# EAGLE board ASD2123 (EAGLE 6.3)
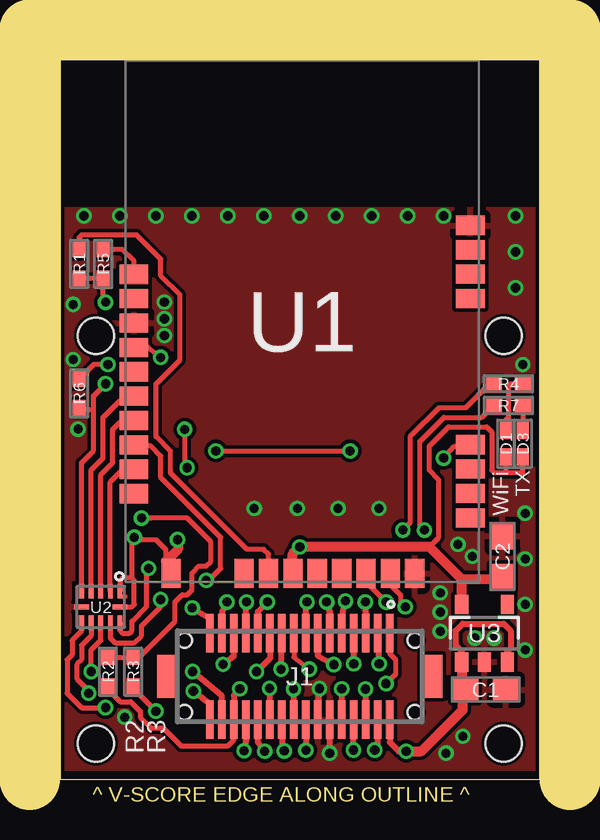
[diagram p0: board, top side]
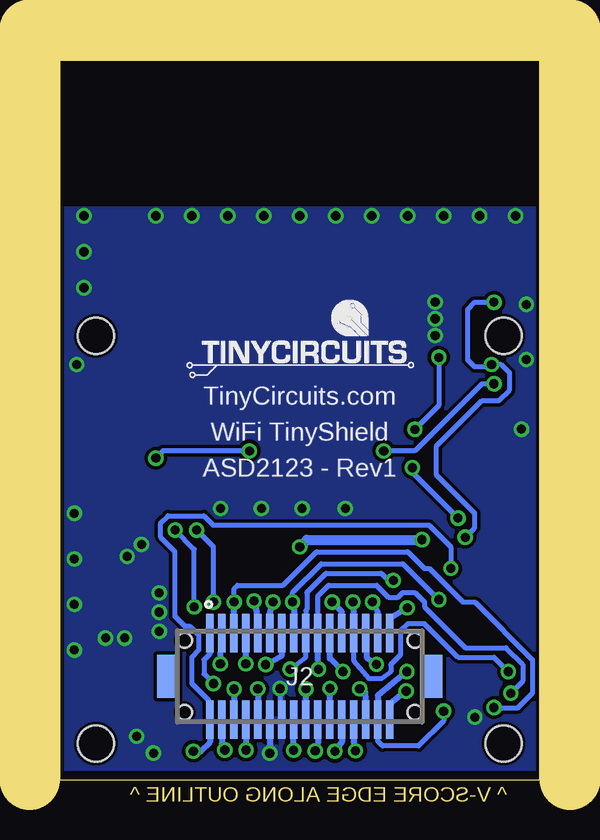
[diagram p1: board, bottom side, seen from below]

Size 20 x 30 mm. Coordinates in mm from the lower left corner, seen from the top.
Outline: 20,0 0,0 0,30 20,30 20,0
Copper layers (1*16): Top 0.035mm / dielectric 1.5mm / Bottom 0.035mm
Design rules "default *": minimum track width 7mil, minimum drill 15mil, track to track 6mil, track to pad 6mil, pad to pad 6mil, via to via 6mil, smd to smd 6mil, copper to edge 6mil, drill to drill 8mil, minimum pad ring 10mil, minimum via ring 5mil, stop-mask expansion 4mil, vias tented up to drill 25mil, thermal gap 10mil
Holes 1.5 mm at 1.5,18.5 18.5,18.5 18.5,1.5 1.5,1.5
tRestrict: 2 lines
bRestrict: 2 lines
Milling: 3 lines

## Footprints (pad centres in the part's own frame; a part is rotated, then mirrored left to right if it is on the bottom)
C0603 = smd 1.1 x 1: 1 -0.85,0; 2 0.85,0
0402_LED = smd 0.7 x 0.5: 1 -0.55,0; 2 0.55,0
DF12-32-DP = smd 0.3 x 1.6: 1 -3.75,-1.8; 2 -3.75,1.8; 3 -3.25,-1.8; 4 -3.25,1.8; 5 -2.75,-1.8; 6 -2.75,1.8; 7 -2.25,-1.8; 8 -2.25,1.8; 9 -1.75,-1.8; 10 -1.75,1.8; 11 -1.25,-1.8; 12 -1.25,1.8; 13 -0.75,-1.8; 14 -0.75,1.8; 15 -0.25,-1.8; 16 -0.25,1.8; 17 0.25,-1.8; 18 0.25,1.8; 19 0.75,-1.8; 20 0.75,1.8; 21 1.25,-1.8; 22 1.25,1.8; 23 1.75,-1.8; 24 1.75,1.8; 25 2.25,-1.8; 26 2.25,1.8; 27 2.75,-1.8; 28 2.75,1.8; 29 3.25,-1.8; 30 3.25,1.8; 31 3.75,-1.8; 32 3.75,1.8 | smd 0.9 x 1.8: F1 -5.5,0; F2 5.5,0 | hole 0.6: -4.8,1.5; 4.8,1.5
DF12-32-DS = smd 0.3 x 1.6: 1 -3.75,1.8; 2 -3.75,-1.8; 3 -3.25,1.8; 4 -3.25,-1.8; 5 -2.75,1.8; 6 -2.75,-1.8; 7 -2.25,1.8; 8 -2.25,-1.8; 9 -1.75,1.8; 10 -1.75,-1.8; 11 -1.25,1.8; 12 -1.25,-1.8; 13 -0.75,1.8; 14 -0.75,-1.8; 15 -0.25,1.8; 16 -0.25,-1.8; 17 0.25,1.8; 18 0.25,-1.8; 19 0.75,1.8; 20 0.75,-1.8; 21 1.25,1.8; 22 1.25,-1.8; 23 1.75,1.8; 24 1.75,-1.8; 25 2.25,1.8; 26 2.25,-1.8; 27 2.75,1.8; 28 2.75,-1.8; 29 3.25,1.8; 30 3.25,-1.8; 31 3.75,1.8; 32 3.75,-1.8 | smd 0.9 x 1.8: F1 -5.5,0; F2 5.5,0 | hole 0.6: -4.8,1.5; 4.8,1.5
0402 = smd 0.65 x 0.55: 1 -0.6,0; 2 0.6,0
ATWINC1500-MR210PB = smd 1.2 x 0.8: 1 7.015,-8.19; 2 7.015,-7.174; 3 7.015,-6.158; 4 7.015,-5.142; 6 7.015,0.954; 7 7.015,1.97; 8 7.015,2.986; 9 7.015,4.002; 10 -7.015,1.964; 11 -7.015,0.948; 12 -7.015,-0.068; 13 -7.015,-1.084; 14 -7.015,-2.1; 15 -7.015,-3.116; 16 -7.015,-4.132; 17 -7.015,-5.148; 18 -7.015,-6.164; 19 -7.015,-7.18 | smd 0.8 x 1.2: 20 -5.465,-10.51; 21 -2.417,-10.51; 22 -1.401,-10.51; 23 -0.385,-10.51; 24 0.631,-10.51; 25 1.647,-10.51; 26 2.663,-10.51; 27 3.679,-10.51; 28 4.695,-10.51
UQFN-12 = smd 0.2 x 0.6: 1 -0.8,-0.65; 2 -0.4,-0.65; 3 0,-0.65; 4 0.4,-0.65; 5 0.8,-0.65; 7 0.8,0.65; 8 0.4,0.65; 9 0,0.65; 10 -0.4,0.65; 11 -0.8,0.65 | smd 0.6 x 0.2: 6 0.8,0; 12 -0.8,0
SOT-25 = smd 0.55 x 0.8: 1 -0.95,-1.2; 2 0,-1.2; 3 0.95,-1.2; 4 0.95,1.2; 5 -0.95,1.2

## Placement (x,y rotation side)
C1  10uF  [C0603]  17.75,3.75 0 top
C2  10uF  [C0603]  18.45,9.3 90 top
D1  GREEN  [0402_LED]  18.6,14 90 top
D3  AMBER  [0402_LED]  19.3,14 90 top
J1  DF12-32-DP  [DF12-32-DP]  10,4.3 180 top
J2  DF12-32-DS  [DF12-32-DS]  10,4.3 0 bottom
R1  100K  [0402]  0.8,21.5 90 top
R2  0.0  [0402]  2,4.5 270 top
R3  NP  [0402]  3.05,4.5 270 top
R4  1.00K  [0402]  18.7,16.5 0 top
R5  100K  [0402]  1.8,21.5 90 top
R6  100K  [0402]  0.8,16.1 270 top
R7  1.00K  [0402]  18.7,15.6 0 top
U1  ATWINC1500-MR210PB  [ATWINC1500-MR210PB]  10.1,19.1 0 top
U2  TXB0104  [UQFN-12]  1.7,7.2 180 top
U3  XC6217A33  [SOT-25]  17.7,6.1 0 top
U$1  [DOCFIELD-TINYCIRCUITS-PCB]  33.91,-10 0 top  (outside the outline)

## Library data of the parts
C1 = tinycircuits; PARTNO: AS-ITM-00002
C2 = tinycircuits; DATABASE: ./../../../../../Components/TinyCircuits_Part_Database.txt; PARTNO: AS-ITM-00002
D1 = tinycircuits; PARTNO: AS-ITM-00038
D3 = tinycircuits; PARTNO: AS-ITM-00058
J1 = tinycircuits; PARTNO: AS-ITM-00015
J2 = tinycircuits; PARTNO: AS-ITM-00012
R1 R5 R6 = tinycircuits; PARTNO: AS-ITM-00004
R2 = tinycircuits; DATABASE: ./../../../../../Components/TinyCircuits_Part_Database.txt; PARTNO: AS-ITM-00076
R3 = tinycircuits; DATABASE: ./../../../../../Components/TinyCircuits_Part_Database.txt; PARTNO: AS-ITM-00076; VALUE: 0.0
R4 R7 = tinycircuits; PARTNO: AS-ITM-00003
U1 = tinycircuits; PARTNO: AS-ITM-00292
U2 = tinycircuits; PARTNO: AS-ITM-00048
U3 = tinycircuits; PARTNO: AS-ITM-00046; PNPROTATION: 270; VALUE: XC6210B33
U$1 = tinycircuits; NO_BOM: TRUE

## Nets
+3V3: J1.6 J2.6
+5V: J1.8 J2.8
AD0: J1.11 J2.11
AD1: J1.9 J2.9
AD2: J1.7 J2.7
AD3: J1.5 J2.5 U2.7
AD4/SDA: J1.3 J2.3
AD5/SCL: J1.1 J2.1
AREF: J1.13 J2.13
CS_3V3: U1.16 U2.3
GND: C1.2 C2.2 J1.12 J1.14 J2.12 J2.14 U1.9 U1.12 U1.28 U2.6 U3.2
IO0: J1.24 J2.24
IO1: J1.26 J2.26
IO2: J1.28 J2.28 R2.2
IO3: J1.30 J2.30 R3.2
IO4: J1.32 J2.32
IO5: J1.31 J2.31
IO6: J1.29 J2.29
IO7: J1.27 J2.27
IO8: J1.25 J2.25 U2.9
IO9: J1.23 J2.23
IRQ: R2.1 R3.1 U1.13
MISO: J1.17 J2.17 U1.17
MOSI: J1.19 J2.19 U2.8
MOSI_3V3: U1.15 U2.4
N$1: R1.2 U1.22
N$2: R4.1 U1.26
N$3: R7.1 U1.27
N$4: R5.2 U1.10
N$8: D1.2 R4.2
N$9: D3.2 R7.2
RESET: J1.22 J2.22
RESET_3V3: R6.2 U1.4 U2.5
RSV0: J1.20 J2.20
RSV1: J1.18 J2.18
RSV2: J1.16 J2.16
SCK: J1.15 J2.15 U2.10
SCK_3V3: U1.18 U2.2
SS: J1.21 J2.21
VBATT: J1.4 J2.4
VCC: C1.1 J1.2 J2.2 U2.11 U3.1 U3.3
VCC_3V3: C2.1 D1.1 D3.1 R1.1 R5.1 R6.1 U1.20 U1.23 U2.1 U2.12 U3.5
VIN: J1.10 J2.10

## Tracks (layer width: path | path; a pad name or v marks a point on that pad's centre or on a via)
+3V3  (via drill 0.38)
  Top 0.254: J2.6 v12.75,3.77 v12.74,3.77
  Bottom 0.254: v12.74,3.77 12.74,2.51 J2.6
+5V  (via drill 0.38)
  Top 0.254: v12.24,1.23 J2.8
  Bottom 0.254: J2.8 12.25,1.21 v12.24,1.23
AD0  (via drill 0.38)
  Top 0.254: v11.12,7.4 11.25,6.95 J2.11
  Bottom 0.254: J2.11 11.25,6.95 v11.12,7.4
AD1  (via drill 0.38)
  Top 0.254: J2.9 11.79,7 v11.91,7.44
  Bottom 0.254: v11.91,7.44 11.78,7 J2.9
AD2  (via drill 0.38)
  Top 0.254: v12.25,4.83 J2.7
  Bottom 0.254: v12.25,4.83 J2.7
AD3  (via drill 0.38)
  Top 0.203: U2.7 0.9,6.2 0.5,5.8 0.5,5.2 0.3,5 0.3,3.6 0.9,3 v1.9,3
  Top 0.254: v12.73,7.4 12.73,7.02 J2.5
  Bottom 0.203: v12.73,7.4 12.73,7.97 12.6,8.1 10.7,8.1 9.3,9.5 5.5,9.5 4.8,8.8 4.6,8.8 3.2,7.4 2.7,7.4 0.3,5 0.3,3.6 0.9,3 v1.9,3
  Bottom 0.254: J2.5 12.75,6.98 v12.73,7.4
AD4/SDA  (via drill 0.38)
  Top 0.254: v13.31,4.83 13.31,5 J2.3
  Bottom 0.254: J2.3 13.28,5.86 v13.31,4.83
AD5/SCL  (via drill 0.38)
  Top 0.203: v13.6,4 14,4.4 14,5 13.75,5.25 J2.1
  Bottom 0.203: J2.1 13.75,5.25 14,5 14,4.4 v13.6,4
AREF  (via drill 0.38)
  Top 0.254: J2.13 10.77,5.14 v11.42,4.79
  Bottom 0.254: v11.42,4.79 10.77,5.14 J2.13
CS_3V3
  Top 0.203: U2.3 1.7,12.7 2.2,13.2 2.2,14.6 2.5,14.9 3.12,14.9 U1.16
GND  (via drill 0.38)
  Top 0.203: v11.25,1.1 11.25,2.46 J1.12 | v10.83,3.79 10.75,3.54 J1.14 v10.83,3.79
  Top 0.254: v11.25,1.1 11.25,2.46
  Bottom 0.203: J1.14 v10.83,3.79 | 11.25,1.13 v11.25,1.1
  Bottom 0.254: J1.12 11.25,1.13
  other vias: 15.86,6.18 0.75,14.61 17.3,5.9 15.86,6.98 15.86,7.78 4.35,18.51 4.35,19.21 4.35,19.91 1,23.5 2.5,23.5 4,23.5 5.5,23.5 7,23.5 8.5,23.5 10,23.5 11.5,23.5 13,23.5 14.5,23.5 16,23.5 19,23.5 19,22 19,20.5 17.2,9.3 16.6,9.8 0.55,19.81 0.55,17.51 19.3,17.3 19.4,11.1 19.4,9.2 19.4,7.3 19.4,5.4 18.1,5.9 16.8,1.8 16.1,1.1 13.3,11.3 11.6,11.3 9.9,11.3 8.1,11.3 2.7,2.6
  pour Top: 0,30 20,30 20,0 0,0
  pour Bottom: 0,30 20,30 20,0 0,0
IO0  (via drill 0.38)
  Top 0.254: v8.54,1.18 8.25,1.56 J2.24
  Bottom 0.254: J2.24 8.25,1.56 v8.54,1.18
IO1  (via drill 0.38)
  Top 0.254: J2.26 7.75,1.63 v7.67,1.2
  Bottom 0.203: 7.73,2.48 J2.26
  Bottom 0.254: v7.67,1.2 7.73,1.61 7.73,2.48
IO2  (via drill 0.38)
  Top 0.203: R2.2 2,3.75 2.5,3.25 2.95,3.25 3.35,2.85 3.35,2.6 3.8,2.15 4.3,2.15 5.05,1.4 7,1.4 7.25,1.65 J2.28
  Top 0.254: v7.5,3.78 7.33,3.66 7.25,3.49 7.25,2.61 7.26,2.51 J2.28
  Bottom 0.254: J2.28 7.24,3.43 7.28,3.65 v7.5,3.78
IO3  (via drill 0.38)
  Top 0.203: R3.2 3.05,3.8 v4,2.85
  Top 0.254: J2.30 6.75,3.49 v5.53,4.5
  Bottom 0.203: v4,2.85 4,2.45 5.05,1.4 6.55,1.4 6.75,1.6 J2.30
  Bottom 0.254: v5.53,4.5 6.75,3.51 6.77,2.53 J2.30
IO4  (via drill 0.38)
  Top 0.254: J2.32 6.25,3.14 v5.56,3.69
  Bottom 0.254: v5.56,3.69 5.61,3.65 6.21,3.18 6.21,3.14 6.26,3.1 J2.32
IO5  (via drill 0.38)
  Top 0.254: v5.52,7.16 6.23,6.73 J2.31
  Bottom 0.254: J2.31 6.26,6.69 v5.52,7.16
IO6  (via drill 0.38)
  Top 0.254: J2.29 6.76,7.01 v6.96,7.4
  Bottom 0.254: J2.29 6.75,6.98 v6.96,7.4
IO7  (via drill 0.38)
  Top 0.254: v6.8,4.8 7.26,5.15 J2.27
  Bottom 0.254: J2.27 7.19,5.06 v6.8,4.8
IO8  (via drill 0.38)
  Top 0.203: 7.78,6.13 J2.25 | v1.3,4.5 1.3,5.4 1.7,5.8 U2.9
  Top 0.254: J2.25 7.75,7.02 v7.78,7.4
  Bottom 0.203: J2.25 7.75,4.95 7.1,4.2 6.6,4.2 6.2,4.5 6.2,4.8 5.8,5.2 5.8,6.2 5.5,6.5 4.8,6.5 3.4,5.1 1.9,5.1 v1.3,4.5
  Bottom 0.254: J2.25 7.75,7.02 v7.78,7.4
IO9  (via drill 0.38)
  Top 0.254: v8.65,7.4 8.25,7 J2.23
  Bottom 0.254: J2.23 8.25,7 v8.65,7.4
IRQ  (via drill 0.38)
  Top 0.203: R2.1 R3.1 3.3,5.1 4.8,6.6 4.8,7.4 5.1,7.7 5.3,7.7 5.5,7.9 5.5,8.6 5.8,8.9 6.1,8.9 6.3,9.1 6.3,9.9 5.3,10.9 v3.4,10.9 3.8,10.9 | U1.13 3.68,18.02 v4.2,17.6 | v5.2,14.6 5.2,13.1 v5.3,13
  Bottom 0.203: v4.2,17.6 4.2,15.6 v5.2,14.6 | v5.3,13 5.3,12.8 v3.4,10.9
MISO  (via drill 0.38)
  Top 0.203: 9.74,6.11 J2.17 9.75,5.1 v10.4,4.6 | U1.17 3.14,13.9 3.8,13.9 4.2,13.5 4.2,12.6 6.7,10.1 6.7,8.8 6.2,8.3 v6.1,8.3
  Bottom 0.203: v10.4,4.6 9.75,5.1 J2.17 9.75,7.05 9.7,7.1 9.7,7.8 8.9,8.6 6.6,8.6 6.3,8.3 v6.1,8.3
MOSI  (via drill 0.38)
  Top 0.203: U2.8 1.3,6 0.9,5.6 0.9,5 0.7,4.8 0.7,4.2 1.2,3.7 v1.2,3.6
  Top 0.254: v9.22,4.6 9.23,5.26 J2.19
  Bottom 0.203: J2.19 9.25,7.65 8.8,8.1 6.8,8.1 6.3,7.6 5.9,7.6 5.7,7.8 5.2,7.8 4.8,7.4 4.8,7.2 3.1,5.5 1.4,5.5 0.7,4.8 0.7,4.1 v1.2,3.6
  Bottom 0.254: J2.19 9.25,5.26 v9.22,4.6
MOSI_3V3
  Top 0.203: U2.4 1.3,12.9 1.8,13.4 1.8,15.1 2.5,15.8 3,15.8 U1.15
N$1
  Top 0.203: U1.22 8.7,9.4 8.5,9.6 7.8,9.6 4.6,12.8 4.6,13.7 4,14.3 4,16.5 5,17.5 5,20.2 4.2,21 4.2,21.7 3.2,22.7 0.9,22.7 0.8,22.6 R1.2
N$2  (via drill 0.38)
  Top 0.203: U1.26 12.76,8.24 v13.6,7.4 | v14.3,10.4 14.6,10.7 14.6,14.3 15.8,15.5 16.9,15.5 17.9,16.5 R4.1
  Bottom 0.203: v13.6,7.4 13.6,9.7 v14.3,10.4
N$3  (via drill 0.38)
  Top 0.203: U1.27 13.78,8.12 14.2,7.7 14.2,7.4 v14.4,7.2 | v15.2,10.4 15,10.6 15,14.1 16,15.1 17.6,15.1 R7.1
  Bottom 0.203: v14.4,7.2 14.4,9.6 v15.2,10.4
N$4
  Top 0.203: U1.10 3.09,21.61 2.6,22.1 R5.2
N$8
  Top 0.203: R4.2 18.8,16.5 18.7,16.4 18.7,15.1 18.6,15 D1.2
N$9
  Top 0.203: R7.2 D3.2
RESET  (via drill 0.38)
  Top 0.254: v8.74,3.8 J2.22
  Bottom 0.254: J2.22 8.75,3.69 v8.74,3.8
RESET_3V3  (via drill 0.38)
  Top 0.203: U2.5 0.9,13.2 1.4,13.7 1.4,15.4 | v16,13.4 16.46,13.9 17.06,13.9 U1.4 | v6.5,13.7 v12.1,13.7 | 1.4,15.4 1.4,16 v1.9,16.5 | R6.2 1.4,15.4
  Bottom 0.203: v16,13.4 15.7,13.7 v12.1,13.7 | v1.9,16.5 2.4,16.5 5.2,13.7 v6.5,13.7
RSV0  (via drill 0.38)
  Top 0.254: J2.20 9.25,1.2 v9.36,1.19
  Bottom 0.254: J2.20 9.25,1.84 9.25,1.2 v9.36,1.19
RSV1  (via drill 0.38)
  Top 0.254: v9.74,3.77 9.74,2.51 J2.18
  Bottom 0.254: J2.18 9.75,3.72 v9.74,3.77
RSV2  (via drill 0.38)
  Top 0.254: J2.16 10.25,1.16 v10.25,1.22
  Bottom 0.254: v10.25,1.22 J2.16
SCK  (via drill 0.38)
  Top 0.203: U2.10 2.1,5.9 2.3,5.7 3.1,5.7 3.4,6 3.4,6.4 4.2,7.2 v4.2,7.5
  Top 0.254: J2.15 10.25,7.15 v10.3,7.4
  Bottom 0.203: v4.2,7.5 5.7,9 9.1,9 10.3,7.8 v10.3,7.4
  Bottom 0.254: v10.3,7.4 10.25,7.15 J2.15
SCK_3V3
  Top 0.203: U2.2 2.1,12.4 2.6,12.9 3.15,12.9 U1.18
SS  (via drill 0.38)
  Top 0.254: J2.21 8.75,5.05 v8.2,4.5
  Bottom 0.254: v8.2,4.5 8.75,5.05 J2.21
VBATT  (via drill 0.38)
  Top 0.254: v13.13,1.23 13.25,1.48 J2.4
  Bottom 0.254: J2.4 13.25,1.5 v13.13,1.23
VCC  (via drill 0.38)
  Top 0.2: v14.44,1.18 14.47,1.15
  Top 0.203: U2.11 2.5,6.2 2.6,6.1 2.9,6.1 3,6.2 3,6.6 3.6,7.2 3.6,8.5 3.7,8.6 v3.7,8.8
  Top 0.254: J2.2 13.75,1.56 14.13,1.18 14.38,1.18 v14.44,1.18 | U3.1 16.75,5.35 16.5,5.6 16.5,6.2 16.8,6.5 18.5,6.5 18.8,6.2 18.8,5.5 18.65,5.35 U3.3
  Top 0.406: v14.44,1.18 15.08,1.18 16.8,2.9 16.8,3.65 C1.1 16.75,3.9 U3.1
  Bottom 0.203: J2.2 13.8,2.55 13.8,3.3 14.5,4 14.5,5.1 14.2,5.4 14.2,6 14.6,6.4 14.8,6.4 15.2,6.8 15.2,9.5 15.8,10.1 15.8,10.7 15.5,11 14,11 13.6,10.6 4.6,10.6 3.7,9.7 v3.7,8.8
  Bottom 0.254: v14.44,1.18 14.38,1.18 14.13,1.18 13.75,1.56 J2.2
VCC_3V3  (via drill 0.38)
  Top 0.203: U2.12 3,7.2 3.1,7.3 3.1,8.3 3,8.4 | 3,8.4 2.6,8.4 2.5,8.3 U2.1 | 4.5,8.9 4.73,8.66 U1.20 4.43,8.8 4.43,9.1 4.43,9.57 4,10 3.2,10 v3.1,10.1 3,10 3,8.4 | R1.1 R5.1 1.8,20 v1.9,19.9 | 15.4,9.7 15.8,10.1 15.8,12.5 15.4,12.9 15.4,13.9 16.2,14.7 17.8,14.7 18,14.5 18,12.9 18.1,12.8 18.6,12.8 | v2,17.3 1.4,17.3 R6.1 | 18.6,12.8 19.3,12.8 D3.1 | D1.1 18.6,12.8
  Top 0.406: U3.5 16.75,8.35 | 16.75,8.35 15.4,9.7 v10,9.7 9.7,9.4 9.7,8.61 U1.23 | v4.9,10 4.93,9.6 4.43,9.1 | C2.1 17.95,8.35 16.75,8.35
  Bottom 0.203: v3.1,10.1 2.7,10.5 2.7,11.1 4.3,12.7 4.3,13.9 2.4,15.8 1.7,15.8 1.25,16.25 1.25,16.95 1.6,17.3 v2,17.3 2.1,17.2 2.7,17.2 3,17.5 3,19.6 2.7,19.9 v1.9,19.9
  Bottom 0.406: v10,9.7 9.7,10 v4.9,10
VIN  (via drill 0.38)
  Top 0.254: J2.10 v11.76,3.78 v11.75,3.78
  Bottom 0.254: v11.75,3.78 J2.10

## Text on the board
Dimension: ^ V-SCORE EDGE ALONG OUTLINE ^
tPlace: TX | WiFi | R2 | R3
bPlace: TinyCircuits.com | WiFi TinyShield | ASD2123 - Rev1
Document: FABRICATION DRAWING | NOTES: | 1. PRINTED CIRCUIT BOARD MADE FROM NEMA GRADE FR-4 EPOXY LAMINATE | WITH 1 OUNCE COPPER PLATING AND .024 THICKNESS. | 2. ALL DIMENSIONS ARE GIVEN IN INCHES. | 3. CIRCUIT PATHS ARE FOR REFERENCE ONLY. | 4. HOLE SIZES SHOWN ARE FINISHED DIAMETERS AFTER PLATING. | 5. BOARD PLATED USING REFLOW OR SIMILAR METHOD. | 6. BOARD TO HAVE BLUE SOLDER MASK ON PLATED SURFACES USING WET FILM | 7. SILKSCREEN BOARD USING WHITE INK. | SR100 OR SR1010 EPOXY. EQUIVALENT WET OR DRY FILM MAY BE USED. | 8. THE FOLLOWING INFORMATION APPLIES TO THIS BOARD: | * 2 COPPER LAYERS | * .024 BOARD THICKNESS | * REQUIRES TOP SIDE SILKSCREEN | Released under the Creative Commons Attribution Share-Alike 3.0 License | http://creativecommons.org/licenses/by-sa/3.0 | Original Arduino Uno Design by Team Arduino | LilyPad Arduino Design by Leah Buechley and Sparkfun Electronics | TinyDuino, TinyLily and TinyShield Designs by TinyCircuits | TinyShield - ATWINC1500 | AS-PCB-ASD2123 | 1